# EAGLE board Task 3 (EAGLE 7.6.0)

Size 73.58 x 63.39 mm. Coordinates in mm from the lower left corner, seen from the top.
Outline: 0,0 56.82,0 56.82,53.33 0,53.33 0,0
Copper layers (1*16): Top 0.035mm / dielectric 1.5mm / Bottom 0.035mm
Design rules "default": minimum track width 10mil, minimum drill 24mil, track to track 8mil, track to pad 8mil, pad to pad 8mil, via to via 8mil, smd to smd 8mil, copper to edge 40mil, drill to drill 8mil, minimum pad ring 10mil, minimum via ring 8mil, stop-mask expansion 4mil, vias tented up to drill 0mil, thermal gap 10mil

## Footprints (pad centres in the part's own frame; a part is rotated, then mirrored left to right if it is on the bottom)
PIEZO-22MM = drill 1 pad 2.54: P$1 -5,0; P$2 5,0
0207/10 = drill 0.813 octagon: 1 -5.08,0; 2 5.08,0
TL1105 = drill 1 pad 1.676: 1 -2.25,3.25; 2 2.25,3.25; 3 -2.25,-3.25; 4 2.25,-3.25
ARDUINO_UNO = drill 1.016 pad 1.88: 0 63.5,50.8; 1 60.96,50.8; 2 58.42,50.8; 3 55.88,50.8; 3.3V 35.56,2.54; 4 53.34,50.8; 5 50.8,50.8; 5V 38.1,2.54; 6 48.26,50.8; 7 45.72,50.8; 8 41.656,50.8; 9 39.116,50.8; 10 36.576,50.8; 11 34.036,50.8; 12 31.496,50.8; 13 28.956,50.8; A0 50.8,2.54; A1 53.34,2.54; A2 55.88,2.54; A3 58.42,2.54; A4 60.96,2.54; A5 63.5,2.54; AREF 23.876,50.8; GND 26.416,50.8; GND. 43.18,2.54; GND.. 40.64,2.54; I/OREF 30.48,2.54; N/C 27.94,2.54; RESET 33.02,2.54; SCL 18.796,50.8; SDA 21.336,50.8; VIN 45.72,2.54 | hole 3.2: 66.04,7.62; 66.04,35.56; 15.24,50.8; 13.97,2.54

## Placement (x,y rotation side)
PIEZO1  [PIEZO-22MM]  5,657.78 0 top  (outside the outline)
R1  2k‎Ω  [0207/10]  5,340.28 0 top  (outside the outline)
R2  200‎Ω  [0207/10]  5,352.98 0 top  (outside the outline)
R3  400‎Ω  [0207/10]  5,365.68 0 top  (outside the outline)
R4  800‎Ω  [0207/10]  5,378.38 0 top  (outside the outline)
R5  1.6k‎Ω  [0207/10]  5,391.08 0 top  (outside the outline)
R6  3.2k‎Ω  [0207/10]  5,403.78 0 top  (outside the outline)
R7  1k‎Ω  [0207/10]  5,416.48 0 top  (outside the outline)
R8  12.8k‎Ω  [0207/10]  5,429.18 0 top  (outside the outline)
R9  2k‎Ω  [0207/10]  5,441.88 0 top  (outside the outline)
R10  200‎Ω  [0207/10]  5,454.58 0 top  (outside the outline)
R11  400‎Ω  [0207/10]  5,467.28 0 top  (outside the outline)
R12  800‎Ω  [0207/10]  5,479.98 0 top  (outside the outline)
R13  1.6k‎Ω  [0207/10]  5,492.68 0 top  (outside the outline)
R14  3.2k‎Ω  [0207/10]  5,505.38 0 top  (outside the outline)
R15  6.4k‎Ω  [0207/10]  5,518.08 0 top  (outside the outline)
R16  12.8k‎Ω  [0207/10]  5,530.78 0 top  (outside the outline)
R17  2k‎Ω  [0207/10]  5,543.48 0 top  (outside the outline)
R18  200‎Ω  [0207/10]  5,556.18 0 top  (outside the outline)
R19  400‎Ω  [0207/10]  5,568.88 0 top  (outside the outline)
R20  800‎Ω  [0207/10]  5,581.58 0 top  (outside the outline)
R21  1.6k‎Ω  [0207/10]  5,594.28 0 top  (outside the outline)
R22  3.2k‎Ω  [0207/10]  5,606.98 0 top  (outside the outline)
R23  6.4k‎Ω  [0207/10]  5,619.68 0 top  (outside the outline)
R24  12.8k‎Ω  [0207/10]  5,632.38 0 top  (outside the outline)
R25  25.6k‎Ω  [0207/10]  5,645.08 0 top  (outside the outline)
S1  [TL1105]  5,22.78 0 top
S2  [TL1105]  5,35.48 0 top
S3  [TL1105]  5,48.18 0 top
S5  [TL1105]  5,60.88 0 top
S6  [TL1105]  5,73.58 0 top  (outside the outline)
S7  [TL1105]  5,86.28 0 top  (outside the outline)
S8  [TL1105]  5,98.98 0 top  (outside the outline)
S9  [TL1105]  5,111.68 0 top  (outside the outline)
S10  [TL1105]  5,124.38 0 top  (outside the outline)
S11  [TL1105]  5,213.28 0 top  (outside the outline)
S12  [TL1105]  5,225.98 0 top  (outside the outline)
S13  [TL1105]  5,137.08 0 top  (outside the outline)
S14  [TL1105]  5,149.78 0 top  (outside the outline)
S15  [TL1105]  5,162.48 0 top  (outside the outline)
S16  [TL1105]  5,175.18 0 top  (outside the outline)
S17  [TL1105]  5,187.88 0 top  (outside the outline)
S18  [TL1105]  5,200.58 0 top  (outside the outline)
S19  [TL1105]  5,238.68 0 top  (outside the outline)
S20  [TL1105]  5,251.38 0 top  (outside the outline)
S21  [TL1105]  5,264.08 0 top  (outside the outline)
S22  [TL1105]  5,276.78 0 top  (outside the outline)
S23  [TL1105]  5,289.48 0 top  (outside the outline)
S24  [TL1105]  5,302.18 0 top  (outside the outline)
S25  [TL1105]  5,314.88 0 top  (outside the outline)
S26  [TL1105]  5,327.58 0 top  (outside the outline)
U2  [ARDUINO_UNO]  5,10.08 0 top

## Library data of the parts
PIEZO1 R1-R25 S1-S3 S5-S26 U2 = AUTODESK_CIRCUITS_BREADBOARD

## Nets
N$1: PIEZO1.P$2 S1.4 S2.4 S3.4 S5.4 S6.4 S7.4 S8.4 S9.4 S10.4 S11.4 S12.4 S13.4 S14.4 S15.4 S16.4 S17.4 S18.4 S19.4 S20.4 S21.4 S22.4 S23.4 S24.4 S25.4 S26.4 U2.GND.
N$2: S1.2
N$3: S1.1
N$4: R17.2 R18.1 S1.3 U2.A3
N$5: S2.2
N$6: S2.1
N$7: R18.2 R19.1 S2.3
N$8: S3.2
N$9: S3.1
N$10: R19.2 R20.1 S3.3
N$11: S5.2
N$12: S5.1
N$13: R20.2 R21.1 S5.3
N$14: S6.2
N$15: S6.1
N$16: R21.2 R22.1 S6.3
N$17: S7.2
N$18: S7.1
N$19: R22.2 R23.1 S7.3
N$20: S8.2
N$21: S8.1
N$22: R23.2 R24.1 S8.3
N$23: S9.2
N$24: S9.1
N$25: R24.2 R25.1 S9.3
N$26: S10.2
N$27: S10.1
N$28: R25.2 S10.3
N$29: S13.2
N$30: S13.1
N$31: R16.2 S13.3
N$32: S14.2
N$33: S14.1
N$34: R15.2 R16.1 S14.3
N$35: S15.2
N$36: S15.1
N$37: R14.2 R15.1 S15.3
N$38: S16.2
N$39: S16.1
N$40: R13.2 R14.1 S16.3
N$41: S17.2
N$42: S17.1
N$43: R12.2 R13.1 S17.3
N$44: S18.2
N$45: S18.1
N$46: R11.2 R12.1 S18.3
N$47: S11.2
N$48: S11.1
N$49: R10.2 R11.1 S11.3
N$50: S12.2
N$51: S12.1
N$52: R9.1 R10.1 S12.3 U2.A4
N$53: S19.2
N$54: S19.1
N$55: R1.2 R2.1 S19.3 U2.A5
N$56: S20.2
N$57: S20.1
N$58: S21.2
N$59: S21.1
N$60: S22.2
N$61: S22.1
N$62: S23.2
N$63: S23.1
N$64: S24.2
N$65: S24.1
N$66: S25.2
N$67: S25.1
N$68: S26.2
N$69: S26.1
N$70: R1.1 R9.2 R17.1 U2.5V
N$71: PIEZO1.P$1 U2.8
N$72: R8.2 S26.3
N$73: R7.2 R8.1 S25.3
N$74: R6.2 R7.1 S24.3
N$75: R5.2 R6.1 S23.3
N$76: R4.2 R5.1 S22.3
N$77: R3.2 R4.1 S21.3
N$78: R2.2 R3.1 S20.3

## Tracks (layer width: path | path; a pad name or v marks a point on that pad's centre or on a via)
N$1  (26 unrouted)
N$4  (3 unrouted)
N$7  (2 unrouted)
N$10  (2 unrouted)
N$13  (2 unrouted)
N$16  (2 unrouted)
N$19  (2 unrouted)
N$22  (2 unrouted)
N$25  (2 unrouted)
N$28  (1 unrouted)
N$31  (1 unrouted)
N$34  (2 unrouted)
N$37  (2 unrouted)
N$40  (2 unrouted)
N$43  (2 unrouted)
N$46  (2 unrouted)
N$49  (2 unrouted)
N$52  (3 unrouted)
N$55  (3 unrouted)
N$70  (3 unrouted)
N$71  (1 unrouted)
N$72  (1 unrouted)
N$73  (2 unrouted)
N$74  (2 unrouted)
N$75  (2 unrouted)
N$76  (2 unrouted)
N$77  (2 unrouted)
N$78  (2 unrouted)